# EAGLE board power_strip_monitor_V2 (EAGLE 6.4)
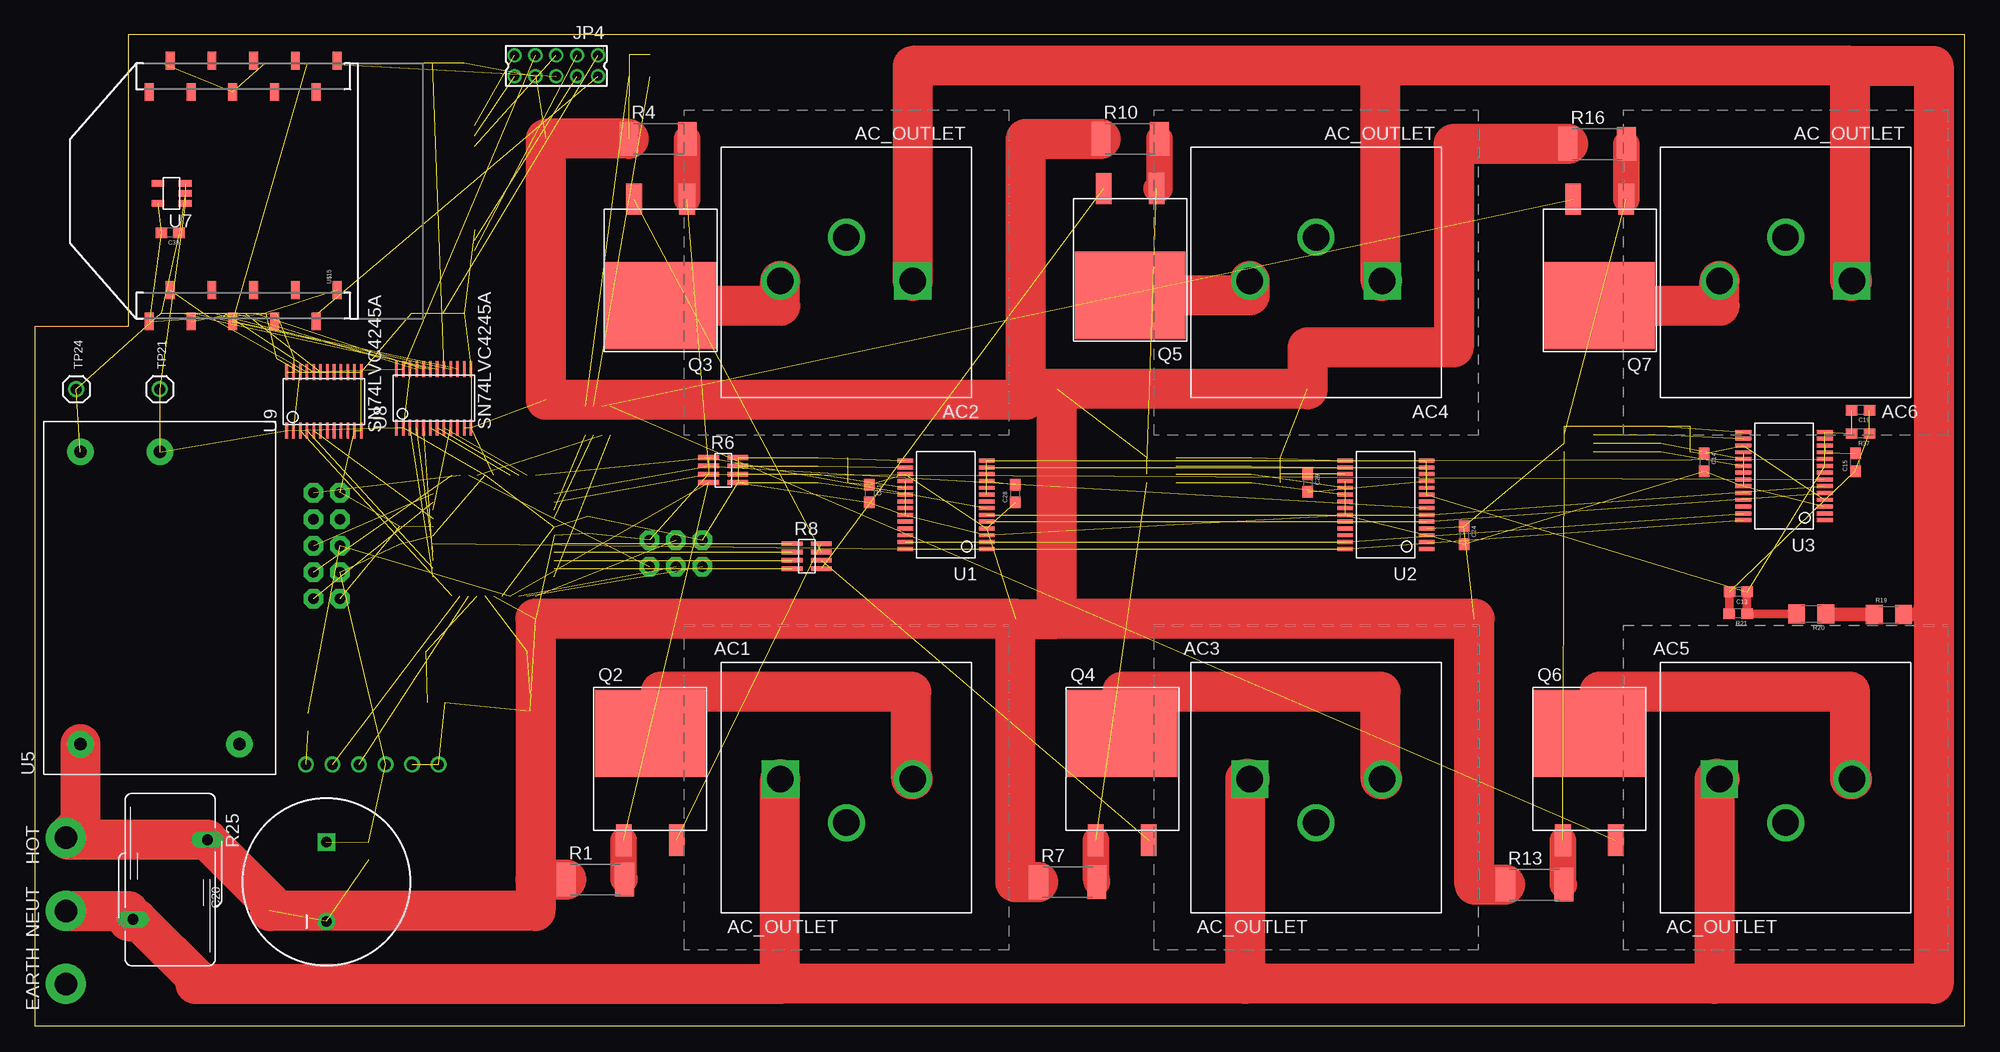
[diagram p0: board, top side]
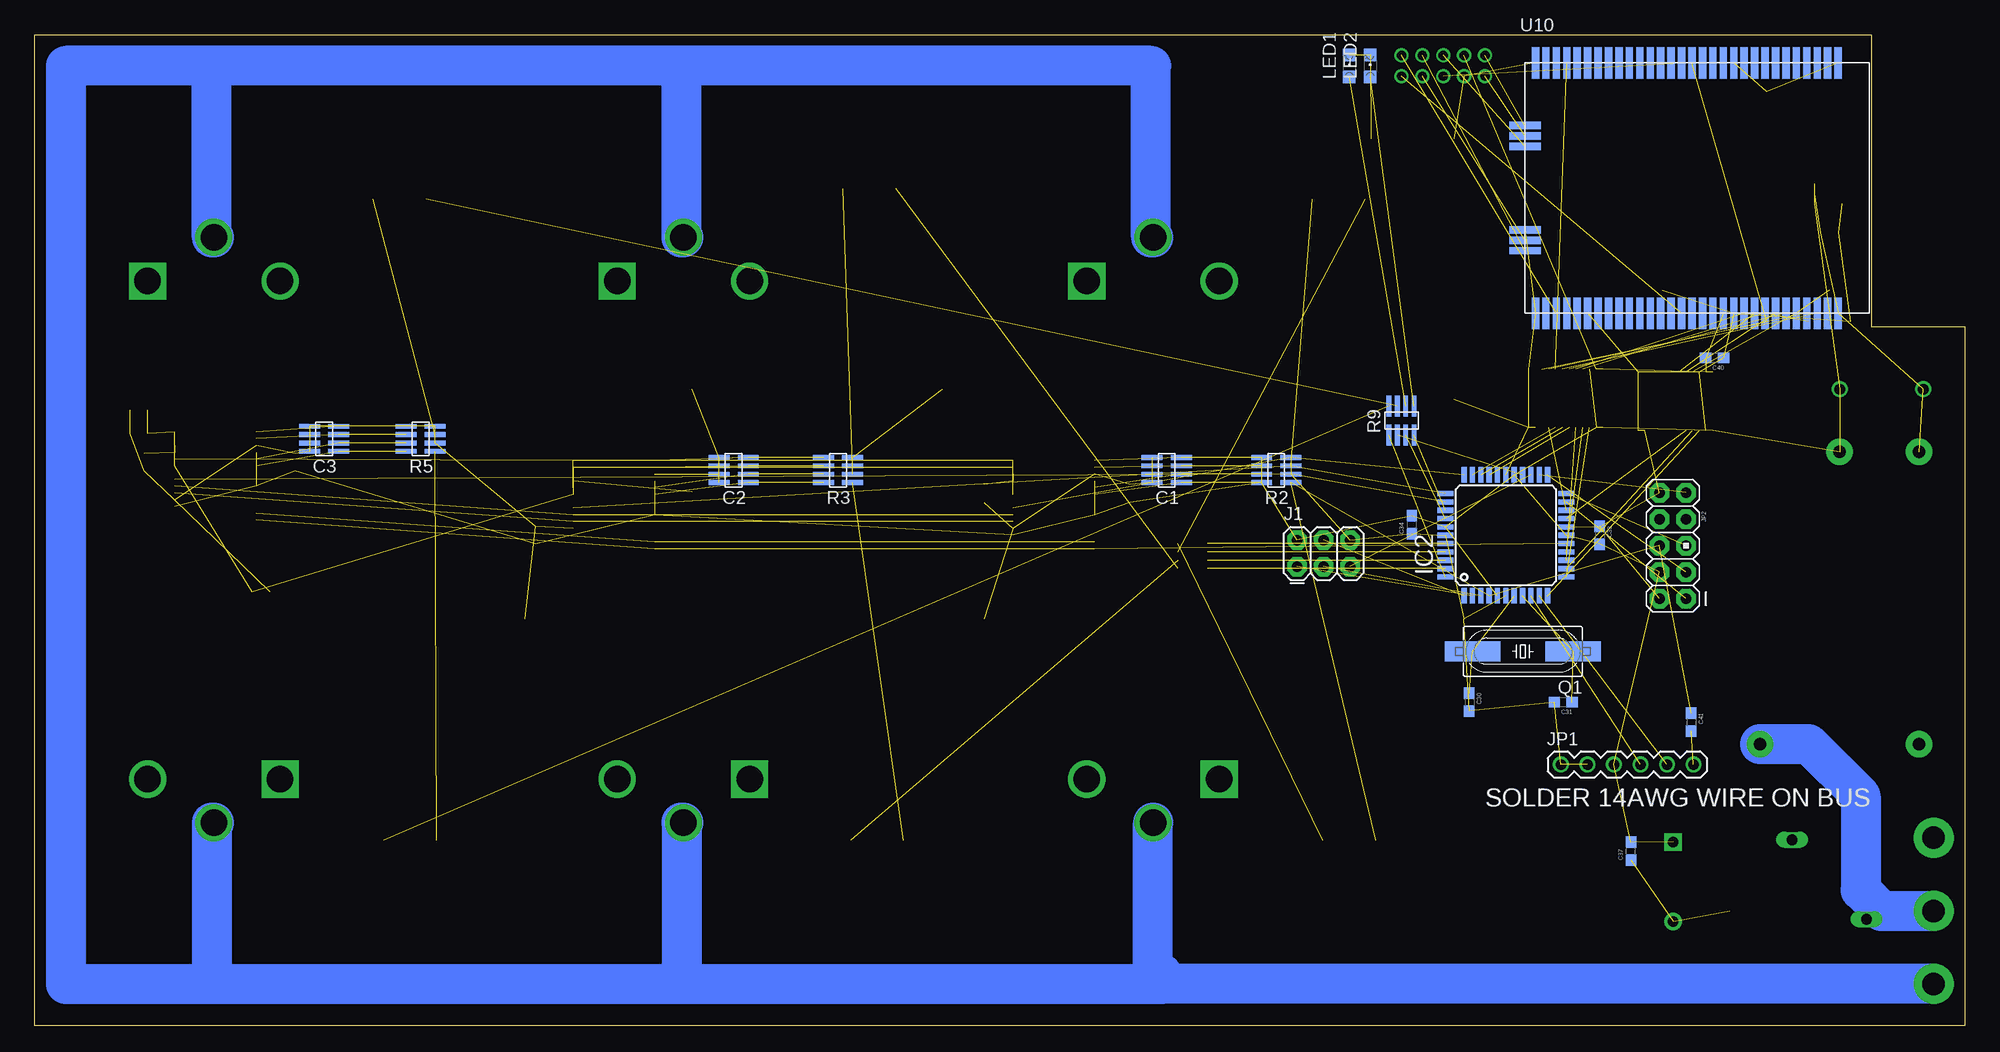
[diagram p1: board, bottom side, seen from below]

Size 185 x 95 mm. Coordinates in mm from the lower left corner, seen from the top.
Outline: 0,0 185,0 185,95 9,95 9,67 0,67 0,0
Copper layers (1+2*15+16): Top 0.0356mm / dielectric 0.2mm / GND 0.017mm / dielectric 1.5mm / VCC 0.017mm / dielectric 0.2007mm / Bottom 0.0356mm
Design rules "LaenPCBOrder *": minimum track width 6mil, minimum drill 13mil, track to track 6mil, track to pad 6mil, pad to pad 6mil, via to via 6mil, smd to smd 6mil, copper to edge 15mil, drill to drill 6mil, minimum pad ring 7mil, minimum via ring 7mil, stop-mask expansion 4mil, vias tented up to drill 0mil, thermal gap 10mil
Net classes: 0 default: width 0.203 mm, drill 0.33 mm, clearance 0.203 mm; 1 Evil_AC: width 0.254 mm, drill 0.33 mm, clearance 2.997 mm

## Footprints (pad centres in the part's own frame; a part is rotated, then mirrored left to right if it is on the bottom)
3-213598-2 = drill 2.54 square: 1 -6.35,0.813 | drill 2.54: 2 6.35,0.813; 3 0,-3.378
1206_NETWORK = smd 2 x 0.45: A1 -1.4,1.2; A2 1.4,1.2; B1 -1.4,0.4; B2 1.4,0.4; C1 -1.4,-0.4; C2 1.4,-0.4; D1 -1.4,-1.2; D2 1.4,-1.2
0603 = smd 1.1 x 1: 1 -0.85,0; 2 0.85,0
CPOL-RADIAL-1000UF-63V = drill 1.016 pad 1.651 square: 1 3.81,0 | drill 1.016 pad 1.676: 2 -3.81,0
14GAUGE_HOLE = drill 2.159 pad 3.81: P$1 0,0
TQFP44 = smd 1.5 x 0.5: 1 -5.8,4; 2 -5.8,3.2; 3 -5.8,2.4; 4 -5.8,1.6; 5 -5.8,0.8; 6 -5.8,0; 7 -5.8,-0.8; 8 -5.8,-1.6; 9 -5.8,-2.4; 10 -5.8,-3.2; 11 -5.8,-4; 23 5.8,-4; 24 5.8,-3.2; 25 5.8,-2.4; 26 5.8,-1.6; 27 5.8,-0.8; 28 5.8,0; 29 5.8,0.8; 30 5.8,1.6; 31 5.8,2.4; 32 5.8,3.2; 33 5.8,4 | smd 0.5 x 1.5: 12 -4,-5.8; 13 -3.2,-5.8; 14 -2.4,-5.8; 15 -1.6,-5.8; 16 -0.8,-5.8; 17 0,-5.8; 18 0.8,-5.8; 19 1.6,-5.8; 20 2.4,-5.8; 21 3.2,-5.8; 22 4,-5.8; 34 4,5.8; 35 3.2,5.8; 36 2.4,5.8; 37 1.6,5.8; 38 0.8,5.8; 39 0,5.8; 40 -0.8,5.8; 41 -1.6,5.8; 42 -2.4,5.8; 43 -3.2,5.8; 44 -4,5.8
2X3 = drill 1.016 pad 1.88 octagon: 1 0,0; 2 0,2.54; 3 2.54,0; 4 2.54,2.54; 5 5.08,0; 6 5.08,2.54
1X06 = drill 1.016: 1 0,0; 2 2.54,0; 3 5.08,0; 4 7.62,0; 5 10.16,0; 6 12.7,0
AVR_ICSP = drill 1.016 pad 1.88 octagon: 1 -1.27,5.08; 2 1.27,5.08; 3 -1.27,2.54; 4 1.27,2.54; 5 -1.27,0; 6 1.27,0; 7 -1.27,-2.54; 8 1.27,-2.54; 9 -1.27,-5.08; 10 1.27,-5.08
87758-1016 = drill 0.9 pad 1.27: 1 -4,-1; 2 -4,1; 3 -2,-1; 4 -2,1; 5 0,-1; 6 0,1; 7 2,-1; 8 2,1; 9 4,-1; 10 4,1
CHIPLED_0805 = smd 1.2 x 1.2: A 0,-1.05; C 0,1.05
HC49UP = smd 5.334 x 1.93: 1 -4.826,0; 2 4.826,0
D2PACK_NXP = smd 1.5 x 3: 1 -2.54,-10.225; 3 2.54,-10.225 | smd 10.6 x 8.35: 2 0,0
R2512 = smd 1.8 x 3.2: 1 -2.8,0; 2 2.8,0
1206 = smd 1.6 x 1.8: 1 -1.4,0; 2 1.4,0
S14K680 = drill 1.016 long: 1 -3.556,-3.81; 2 3.556,3.81
TESTPOINT-100MIL = drill 1.016: 2 0,0
SSOP28L_CIRRUS = smd 1.5 x 0.38: 1 -3.9,4.225; 2 -3.9,3.575; 3 -3.9,2.925; 4 -3.9,2.275; 5 -3.9,1.625; 6 -3.9,0.975; 7 -3.9,0.325; 8 -3.9,-0.325; 9 -3.9,-0.975; 10 -3.9,-1.625; 11 -3.9,-2.275; 12 -3.9,-2.925; 13 -3.9,-3.575; 14 -3.9,-4.225; 15 3.9,-4.225; 16 3.9,-3.575; 17 3.9,-2.925; 18 3.9,-2.275; 19 3.9,-1.625; 20 3.9,-0.975; 21 3.9,-0.325; 22 3.9,0.325; 23 3.9,0.975; 24 3.9,1.625; 25 3.9,2.275; 26 3.9,2.925; 27 3.9,3.575; 28 3.9,4.225
RAC01_02-SC = drill 1.2 pad 2.54: 1 -14,7.62; 2 -14,-7.62; 3 14,7.62; 4 14,0
TSOT23-5_LINEAR = smd 0.62 x 1.22: 1 -0.95,-1.31; 2 0,-1.31; 3 0.95,-1.31; 4 0.95,1.31; 5 -0.95,1.31
TSSOP24_TI = smd 1.55 x 0.25: 1 -2.8,3.575; 2 -2.8,2.925; 3 -2.8,2.275; 4 -2.8,1.625; 5 -2.8,0.975; 6 -2.8,0.325; 7 -2.8,-0.325; 8 -2.8,-0.975; 9 -2.8,-1.625; 10 -2.8,-2.275; 11 -2.8,-2.925; 12 -2.8,-3.575; 13 2.8,-3.575; 14 2.8,-2.925; 15 2.8,-2.275; 16 2.8,-1.625; 17 2.8,-0.975; 18 2.8,-0.325; 19 2.8,0.325; 20 2.8,0.975; 21 2.8,1.625; 22 2.8,2.275; 23 2.8,2.925; 24 2.8,3.575
LTP5901_MODULE = smd 3 x 0.7: 1 -12,13.5; 2 -12,12.5; 3 -12,11.5; 4 -12,10.5; 5 -12,9.5; 6 -12,8.5; 7 -12,7.5; 8 -12,6.5; 9 -12,5.5; 10 -12,4.5; 11 -12,3.5; 12 -12,2.5; 13 -12,1.5; 14 -12,0.5; 15 -12,-0.5; 16 -12,-1.5; 17 -12,-2.5; 18 -12,-3.5; 19 -12,-4.5; 20 -12,-5.5; 21 -12,-6.5; 22 -12,-7.5; 23 -12,-8.5; 24 -12,-9.5; 25 -12,-10.5; 26 -12,-11.5; 27 -12,-12.5; 28 -12,-13.5; 29 -12,-14.5; 30 -12,-15.5; 37 12,-15.5; 38 12,-14.5; 39 12,-13.5; 40 12,-12.5; 41 12,-11.5; 42 12,-10.5; 43 12,-9.5; 44 12,-8.5; 45 12,-7.5; 46 12,-6.5; 47 12,-5.5; 48 12,-4.5; 49 12,-3.5; 50 12,-2.5; 51 12,-1.5; 52 12,-0.5; 53 12,0.5; 54 12,1.5; 55 12,2.5; 56 12,3.5; 57 12,4.5; 58 12,5.5; 59 12,6.5; 60 12,7.5; 61 12,8.5; 62 12,9.5; 63 12,10.5; 64 12,11.5; 65 12,12.5; 66 12,13.5 | smd 0.7 x 3: 31 -6,-16.5; 32 -5,-16.5; 33 -4,-16.5; 34 4,-16.5; 35 5,-16.5; 36 6,-16.5
XBEE-SMD = smd 1.7 x 0.85: 1 -12.5,20; 2 -9.5,18; 3 -12.5,16; 4 -9.5,14; 5 -12.5,12; 6 -9.5,10; 7 -12.5,8; 8 -9.5,6; 9 -12.5,4; 10 -9.5,2; 11 12.5,2; 12 9.5,4; 13 12.5,6; 14 9.5,8; 15 12.5,10; 16 9.5,12; 17 12.5,14; 18 9.5,16; 19 12.5,18; 20 9.5,20

## Placement (x,y rotation side)
AC1  AC_OUTLET  [3-213598-2]  77.81,22.81 0 top
AC2  AC_OUTLET  [3-213598-2]  77.81,72.19 180 top
AC3  AC_OUTLET  [3-213598-2]  122.81,22.81 0 top
AC4  AC_OUTLET  [3-213598-2]  122.81,72.19 180 top
AC5  AC_OUTLET  [3-213598-2]  167.81,22.81 0 top
AC6  AC_OUTLET  [3-213598-2]  167.81,72.19 180 top
C1  CAP_ARRAY  [1206_NETWORK]  76.5,53.25 180 bottom
C2  CAP_ARRAY  [1206_NETWORK]  118,53.25 180 bottom
C3  CAP_ARRAY  [1206_NETWORK]  157.25,56.25 180 bottom
C13  10n  [0603]  163.29,41.57 180 top
C14  .1u  [0603]  160,54 270 top
C15  .1u  [0603]  174.5,54 90 top
C19  10n  [0603]  175,59 180 top
C20  1000uF 10V  [CPOL-RADIAL-1000UF-63V]  27.97,13.79 90 top
C21  .1u  [0603]  80,51 270 top
C24  .1u  [0603]  137,47 270 top
C28  .1u  [0603]  94,51 90 top
C29  .1u  [0603]  122,52 270 top
C30  22p  [0603]  47.5,31 270 bottom
C31  22p  [0603]  38.5,31 180 bottom
C33  .1u  [0603]  35,47 270 bottom
C34  .1u  [0603]  53,48 90 bottom
C37  10u  [0603]  32.01,16.73 90 bottom
C38  10u  [0603]  13,76 180 top
C40  .1u  [0603]  24,64 180 bottom
C41  .1u  [0603]  26.24,29.09 270 bottom
EARTH  1P_HOLE  [14GAUGE_HOLE]  3,4 0 top
HOT  1P_HOLE  [14GAUGE_HOLE]  3,18 0 top
IC2  ATMEGA644A  [TQFP44]  44,47 90 bottom
J1  EXP  [2X3]  64,44 0 bottom
JP1  [1X06]  38.71,25.02 0 bottom
JP2  JTAG  [AVR_ICSP]  28,46 180 bottom
JP4  87758-1016  [87758-1016]  50,92 180 top
LED1  [CHIPLED_0805]  59,92 0 bottom
LED2  [CHIPLED_0805]  57,92 0 bottom
NEUT  1P_HOLE  [14GAUGE_HOLE]  3,11 0 top
Q1  16.384MHz  [HC49UP]  42.37,35.87 180 bottom
Q2  BTA312B-800E  [D2PACK_NXP]  59,28 0 top
Q3  BTA312B-800E  [D2PACK_NXP]  60,69 180 top
Q4  BTA312B-800E  [D2PACK_NXP]  104.25,28 0 top
Q5  BTA312B-800E  [D2PACK_NXP]  105,70 180 top
Q6  BTA312B-800E  [D2PACK_NXP]  149,28 0 top
Q7  BTA312B-800E  [D2PACK_NXP]  150,69 180 top
R1  1m 1%  [R2512]  53.75,14 0 top
R2  220 1%  [1206_NETWORK]  66,53.25 180 bottom
R3  220 1%  [1206_NETWORK]  108,53.25 180 bottom
R4  1m 1%  [R2512]  59.75,85 0 top
R5  220 1%  [1206_NETWORK]  148,56.25 180 bottom
R6  [1206_NETWORK]  66,53.25 0 top
R7  1m 1%  [R2512]  99,13.75 0 top
R8  100  [1206_NETWORK]  74,45 0 top
R9  100  [1206_NETWORK]  54,58 90 bottom
R10  1m 1%  [R2512]  105,85 0 top
R13  1m 1%  [R2512]  143.75,13.5 0 top
R16  1m 1%  [R2512]  149.75,84.5 0 top
R19  470k 200V  [1206]  177.71,39.4 0 top
R20  470k 200V  [1206]  170.26,39.45 180 top
R21  1k 1%  [0603]  163.25,39.5 180 top
R25  S14K680  [S14K680]  13,14 180 top
R37  1k 1%  [0603]  175,56.75 180 top
TP21  TESTPOINT100MIL  [TESTPOINT-100MIL]  12,61 0 top
TP24  TESTPOINT100MIL  [TESTPOINT-100MIL]  4,61 0 top
U1  CS5467  [SSOP28L_CIRRUS]  87.34,49.93 180 top
U2  CS5467  [SSOP28L_CIRRUS]  129.5,49.93 180 top
U3  CS5467  [SSOP28L_CIRRUS]  167.66,52.68 180 top
U5  RAC01_02-SC  [RAC01_02-SC]  12,41 90 top
U7  [TSOT23-5_LINEAR]  13.13,79.76 90 top
U8  SN74LVC4245A  [TSSOP24_TI]  38.26,60.14 90 top
U9  SN74LVC4245A  [TSSOP24_TI]  27.74,59.83 90 top
U10  LTP5901  [LTP5901_MODULE]  25.66,80.28 270 bottom
U$15  XBEE-1B3  [XBEE-SMD]  31,80 90 top

## Library data of the parts
AC1-AC6 C1-C3 EARTH HOT NEUT Q2-Q7 R2 R3 R5 R6 R8 R9 U1-U3 U5 U7-U10 = Cool_Electricity
C13-C15 C19 C21 C24 C28-C31 C33 C34 C37 C38 C40 C41 Q1 R19-R21 R37 = SparkFun
C20 = SparkFun-Passives
IC2 = atmel; MPN: ATMEGA644PV-10AU; OC_FARNELL: 1455123; OC_NEWARK: 58M3748
J1 JP2 = SparkFun-Connectors
JP1 = custom
JP4 = con-molex; MF: MOLEX; MPN: 87758-1016; OC_FARNELL: 7472340; OC_NEWARK: 59J1558
LED1 LED2 = led
R1 R4 R7 R10 R13 R16 = rcl
R25 = varistor
TP21 TP24 = WSNlib
U$15 = SparkFun-RF; PROD_ID: CONN-09042

## Nets
3.3V: C38.2 C40.2 JP4.7 U7.5 U8.23 U8.24 U9.23 U9.24 U10.55 U$15.1
5V: C14.2 C20.1 C21.2 C24.2 C33.2 C34.2 C37.2 IC2.5 IC2.17 IC2.27 IC2.38 J1.2 JP1.3 JP2.4 R6.A2 R6.B2 R6.C2 R6.D2 TP21.2 U1.3 U1.18 U1.23 U2.3 U2.18 U2.23 U3.3 U3.18 U3.23 U5.4 U7.1 U7.3 U8.1 U8.2 U8.22 U9.1
#CS1: IC2.33 R6.A1 U1.7
#CS2: IC2.34 R6.B1 U2.7
#CS3: IC2.35 R6.C1 U3.7
#CS_EXP: IC2.25 J1.5
ATMEGA_TO_FTDI: IC2.10 JP1.5
ATMEGA_TO_MOTE_3V: U8.21 U10.59 U$15.3
ATMEGA_TO_MOTE_5V: IC2.12 U8.3
EARTH: AC1.3 AC2.3 AC3.3 AC4.3 AC5.3 AC6.3 EARTH.P$1
EXP_MISO: IC2.2 J1.1
EXP_MOSI: IC2.1 J1.4
EXP_SCK: IC2.3 J1.3
FLASH_P_ENN: JP4.2 U10.51
FTDI_TO_ATMEGA: IC2.9 JP1.4
GATE1: Q2.3 R8.A2
GATE2: Q3.3 R8.B2
GATE3: Q4.3 R8.C2
GATE4: Q5.3 R8.D2
GATE5: Q6.3 R9.A2
GATE6: Q7.3 R9.B2
GND: C1.A2 C1.B2 C1.C2 C1.D2 C2.A2 C2.B2 C2.C2 C2.D2 C3.A2 C3.B2 C3.C2 C3.D2 C13.2 C14.1 C15.1 C19.1 C20.2 C21.1 C24.1 C28.1 C29.1 C30.2 C31.2 C33.1 C34.1 C37.1 C38.1 C40.1 HOT.P$1 IC2.6 IC2.18 IC2.28 IC2.39 J1.6 JP1.1 JP1.2 JP2.2 JP2.10 JP4.8 LED1.C LED2.C R1.1 R2.B1 R2.D1 R3.B1 R3.D1 R4.1 R5.B1 R5.D1 R7.1 R10.1 R13.1 R16.1 R21.2 R25.1 R37.1 TP24.2 U1.4 U1.17 U2.4 U2.17 U3.4 U3.17 U5.1 U5.3 U7.2 U8.11 U8.12 U8.13 U9.2 U9.11 U9.12 U9.13 U9.22 U10.1 U10.11 U10.20 U10.30 U10.34 U10.37 U10.42 U10.56 U10.66 U$15.10 U$15.16
HOT1: AC1.2 Q2.2
HOT2: AC2.2 Q3.2
HOT3: AC3.2 Q4.2
HOT4: AC4.2 Q5.2
HOT5: AC5.2 Q6.2
HOT6: AC6.2 Q7.2
HRET1: Q2.1 R1.2 R2.A1
HRET2: Q3.1 R2.C1 R4.2
HRET3: Q4.1 R3.A1 R7.2
HRET4: Q5.1 R3.C1 R10.2
HRET5: Q6.1 R5.A1 R13.2
HRET6: Q7.1 R5.C1 R16.2
I1+: C1.A1 R2.A2 U1.20
I1-: C1.B1 R2.B2 U1.19
I2+: C1.C1 R2.C2 U1.16
I2-: C1.D1 R2.D2 U1.15
I3+: C2.A1 R3.A2 U2.20
I3-: C2.B1 R3.B2 U2.19
I4+: C2.C1 R3.C2 U2.16
I4-: C2.D1 R3.D2 U2.15
I5+: C3.A1 R5.A2 U3.20
I5-: C3.B1 R5.B2 U3.19
I6+: C3.C1 R5.C2 U3.16
I6-: C3.D1 R5.D2 U3.15
IPCS_MISO: JP4.5 U10.33
IPCS_MOSI: JP4.4 U10.35
IPCS_SCK: JP4.3 U10.36
IPCS_SSN: JP4.1 U10.39
LED1: LED1.A R9.C2
LED2: LED2.A R9.D2
MISO: U1.6 U2.6 U3.6
MOSI: U1.27 U2.27 U3.27
MOTE_CLI_RX: JP4.10 U10.32
MOTE_CLI_TX: JP4.9 U10.31
MOTE_RADIO_INHIBIT_3V: U8.18 U10.64
MOTE_RADIO_INHIBIT_5V: IC2.30 U8.6
MOTE_RESETN_3V: JP4.6 U8.15 U10.15 U$15.5
MOTE_RESETN_5V: IC2.20 U8.9
MOTE_RX_CTSN_3V: U9.19 U10.58
MOTE_RX_CTSN_5V: IC2.19 U9.5
MOTE_RX_RTSN_3V: U8.20 U10.57
MOTE_RX_RTSN_5V: IC2.15 U8.4
MOTE_SLEEPN_3V: U8.17 U10.27
MOTE_SLEEPN_5V: IC2.31 U8.7
MOTE_TIMEN_3V: U8.16 U10.63
MOTE_TIMEN_5V: IC2.32 U8.8
MOTE_TO_ATMEGA_3V: U9.21 U10.62 U$15.2
MOTE_TO_ATMEGA_5V: IC2.11 U9.3
MOTE_TX_CTSN_3V: U8.19 U10.61
MOTE_TX_CTSN_5V: IC2.14 U8.5
MOTE_TX_RTSN_3V: U9.20 U10.60
MOTE_TX_RTSN_5V: IC2.13 U9.4
N$1: C30.1 IC2.7 Q1.2
N$2: R19.1 R20.1
N$3: C31.1 IC2.8 Q1.1
N$4: C15.2 U3.11 U3.12
N$6: IC2.40 R8.A1
N$7: IC2.41 R8.B1
N$8: IC2.42 R8.C1
N$10: IC2.43 R8.D1
N$11: C29.2 U2.11 U2.12
N$12: IC2.44 R9.A1
N$13: IC2.26 R9.B1
N$14: IC2.36 R9.D1
N$15: C28.2 U1.11 U1.12
N$16: IC2.37 R9.C1
NEUTRAL: AC1.1 AC2.1 AC3.1 AC4.1 AC5.1 AC6.1 NEUT.P$1 R19.2 R25.2 U5.2
RST: C41.1 IC2.4 JP2.6 R6.D1
RTS#: C41.2 JP1.6
SCLK: U1.5 U2.5 U3.5
TCK: IC2.21 JP2.1
TDI: IC2.24 JP2.9
TDO: IC2.23 JP2.3
TMS: IC2.22 JP2.5
V+: C13.1 R20.2 R21.1 U1.9 U1.13 U2.9 U2.13 U3.9 U3.13
V-: C19.2 R37.2 U1.10 U1.14 U2.10 U2.14 U3.10 U3.14
XIN: IC2.16 U1.28 U2.28 U3.28

## Tracks (layer width: path | path; a pad name or v marks a point on that pad's centre or on a via)
3.3V  (9 unrouted)
5V  (34 unrouted)
#CS1  (2 unrouted)
#CS2  (2 unrouted)
#CS3  (2 unrouted)
#CS_EXP  (1 unrouted)
ATMEGA_TO_FTDI  (1 unrouted)
ATMEGA_TO_MOTE_3V  (2 unrouted)
ATMEGA_TO_MOTE_5V  (1 unrouted)
EARTH
  Bottom 3.81: EARTH.P$1 77.81,4 77.81,5 | 77.81,5 AC1.3 | AC3.3 123,19.44 123,4 | 168,4 123,4 | 123,4 77,4 77,5 77.81,5 | AC5.3 168,19.44 168,4 | AC6.3 168,75.56 168,92 | 168,92 182,92 182,4 168,4 | AC4.3 123,75.56 123,92 | 123,92 168,92 | AC2.3 78,75.56 78,92 123,92
EXP_MISO  (1 unrouted)
EXP_MOSI  (1 unrouted)
EXP_SCK  (1 unrouted)
FLASH_P_ENN  (1 unrouted)
FTDI_TO_ATMEGA  (1 unrouted)
GATE1  (1 unrouted)
GATE2  (1 unrouted)
GATE3  (1 unrouted)
GATE4  (1 unrouted)
GATE5  (1 unrouted)
GATE6  (1 unrouted)
GND  (75 unrouted)
  Top 0.813: R21.2 162.4,41.36 C13.2
  Top 3.81: R7.1 94,13.75 94,39 | 94,39 48,39 48,14 | 48,14 R1.1 | R13.1 138,13.5 138,39 98,39 | R16.1 136,84.5 136,65 122,65 122,61 98,61 | 98,61 95,61 | 95,61 95,85 R10.1 | R4.1 49,85 49,60 95,60 95,61 | 48,14 48,11 22.56,11 22.56,11.81 R25.1 3.19,17.81 HOT.P$1 4.38,19.38 U5.1 | 94,39 98,39 | 98,39 98,61
HOT1
  Top 3.81: AC1.2 84,23.63 84,32 60,32 60,27 59,27 Q2.2
HOT2
  Top 3.81: Q3.2 71.47,69 AC2.2
HOT3
  Top 3.81: AC3.2 129,23.63 129,32 104.25,32 Q4.2
HOT4
  Top 3.81: Q5.2 116.47,70 AC4.2
HOT5
  Top 3.81: AC5.2 174,23.63 174,32 150,32 150,28 Q6.2
HOT6
  Top 3.81: Q7.2 161.46,69 AC6.2
HRET1  (1 unrouted)
  Top 2.54: R1.2 56.46,14 Q2.1
HRET2  (1 unrouted)
  Top 2.54: Q3.1 R4.2
HRET3  (1 unrouted)
  Top 2.54: R7.2 101.71,14.25 Q4.1
HRET4  (1 unrouted)
  Top 2.54: Q5.1 107.8,80.22 R10.2
HRET5  (1 unrouted)
  Top 2.54: R13.2 146.46,13.5 Q6.1
HRET6  (1 unrouted)
  Top 2.54: Q7.1 R16.2
I1+  (2 unrouted)
I1-  (2 unrouted)
I2+  (2 unrouted)
I2-  (2 unrouted)
I3+  (2 unrouted)
I3-  (2 unrouted)
I4+  (2 unrouted)
I4-  (2 unrouted)
I5+  (2 unrouted)
I5-  (2 unrouted)
I6+  (2 unrouted)
I6-  (2 unrouted)
IPCS_MISO  (1 unrouted)
IPCS_MOSI  (1 unrouted)
IPCS_SCK  (1 unrouted)
IPCS_SSN  (1 unrouted)
LED1  (1 unrouted)
LED2  (1 unrouted)
MISO  (2 unrouted)
MOSI  (2 unrouted)
MOTE_CLI_RX  (1 unrouted)
MOTE_CLI_TX  (1 unrouted)
MOTE_RADIO_INHIBIT_3V  (1 unrouted)
MOTE_RADIO_INHIBIT_5V  (1 unrouted)
MOTE_RESETN_3V  (3 unrouted)
MOTE_RESETN_5V  (1 unrouted)
MOTE_RX_CTSN_3V  (1 unrouted)
MOTE_RX_CTSN_5V  (1 unrouted)
MOTE_RX_RTSN_3V  (1 unrouted)
MOTE_RX_RTSN_5V  (1 unrouted)
MOTE_SLEEPN_3V  (1 unrouted)
MOTE_SLEEPN_5V  (1 unrouted)
MOTE_TIMEN_3V  (1 unrouted)
MOTE_TIMEN_5V  (1 unrouted)
MOTE_TO_ATMEGA_3V  (2 unrouted)
MOTE_TO_ATMEGA_5V  (1 unrouted)
MOTE_TX_CTSN_3V  (1 unrouted)
MOTE_TX_CTSN_5V  (1 unrouted)
MOTE_TX_RTSN_3V  (1 unrouted)
MOTE_TX_RTSN_5V  (1 unrouted)
N$1  (2 unrouted)
N$2
  Top 1.27: R19.1 171.71,39.4 R20.1
N$3  (2 unrouted)
N$4  (2 unrouted)
N$6  (1 unrouted)
N$7  (1 unrouted)
N$8  (1 unrouted)
N$10  (1 unrouted)
N$11  (2 unrouted)
N$12  (1 unrouted)
N$13  (1 unrouted)
N$14  (1 unrouted)
N$15  (2 unrouted)
N$16  (1 unrouted)
NEUTRAL
  Top 1.27: R19.2 181.4,39.4 182,40
  Top 3.81: 15.44,4 16,4 | 16,4 71.47,4 | 71.47,4 AC1.1 | AC3.1 116,23.63 116,4 | 116,4 71.47,4 | AC5.1 161,23.63 161,4 | 161,4 116,4 | AC2.1 84.17,92 129,92 | AC4.1 129,71.37 129,92 | AC6.1 174,71.37 174,92 | 174,92 129,92 | 174,92 182,92 182,40 182,4 161,4 | NEUT.P$1 9,11 9,10 9.44,10 R25.2 9.81,10.19 16,4
  Bottom 3.81: U5.2 15,27 10,22 10,13 8,11 NEUT.P$1
RST  (3 unrouted)
RTS#  (1 unrouted)
SCLK  (2 unrouted)
TCK  (1 unrouted)
TDI  (1 unrouted)
TDO  (1 unrouted)
TMS  (1 unrouted)
V+  (6 unrouted)
  Top 0.813: R20.2 164.15,39.45 R21.1 164.1,41.36 C13.1
V-  (7 unrouted)
XIN  (3 unrouted)

## Text on the board
bPlace: SOLDER 14AWG WIRE ON BUS